# Altium PCB 16 chan.PcbDoc
Units mil, origin at the board's own origin, x right, y up, seen from the top; angles counter-clockwise.
Board outline 1152 x 1182 mil, 4 copper layers (Top Layer, Ground 2, Power 3, Bottom Layer); 36 components, 44 nets, 181 pads, 95 vias.
Unrouted connection lines stored in the file: 1.
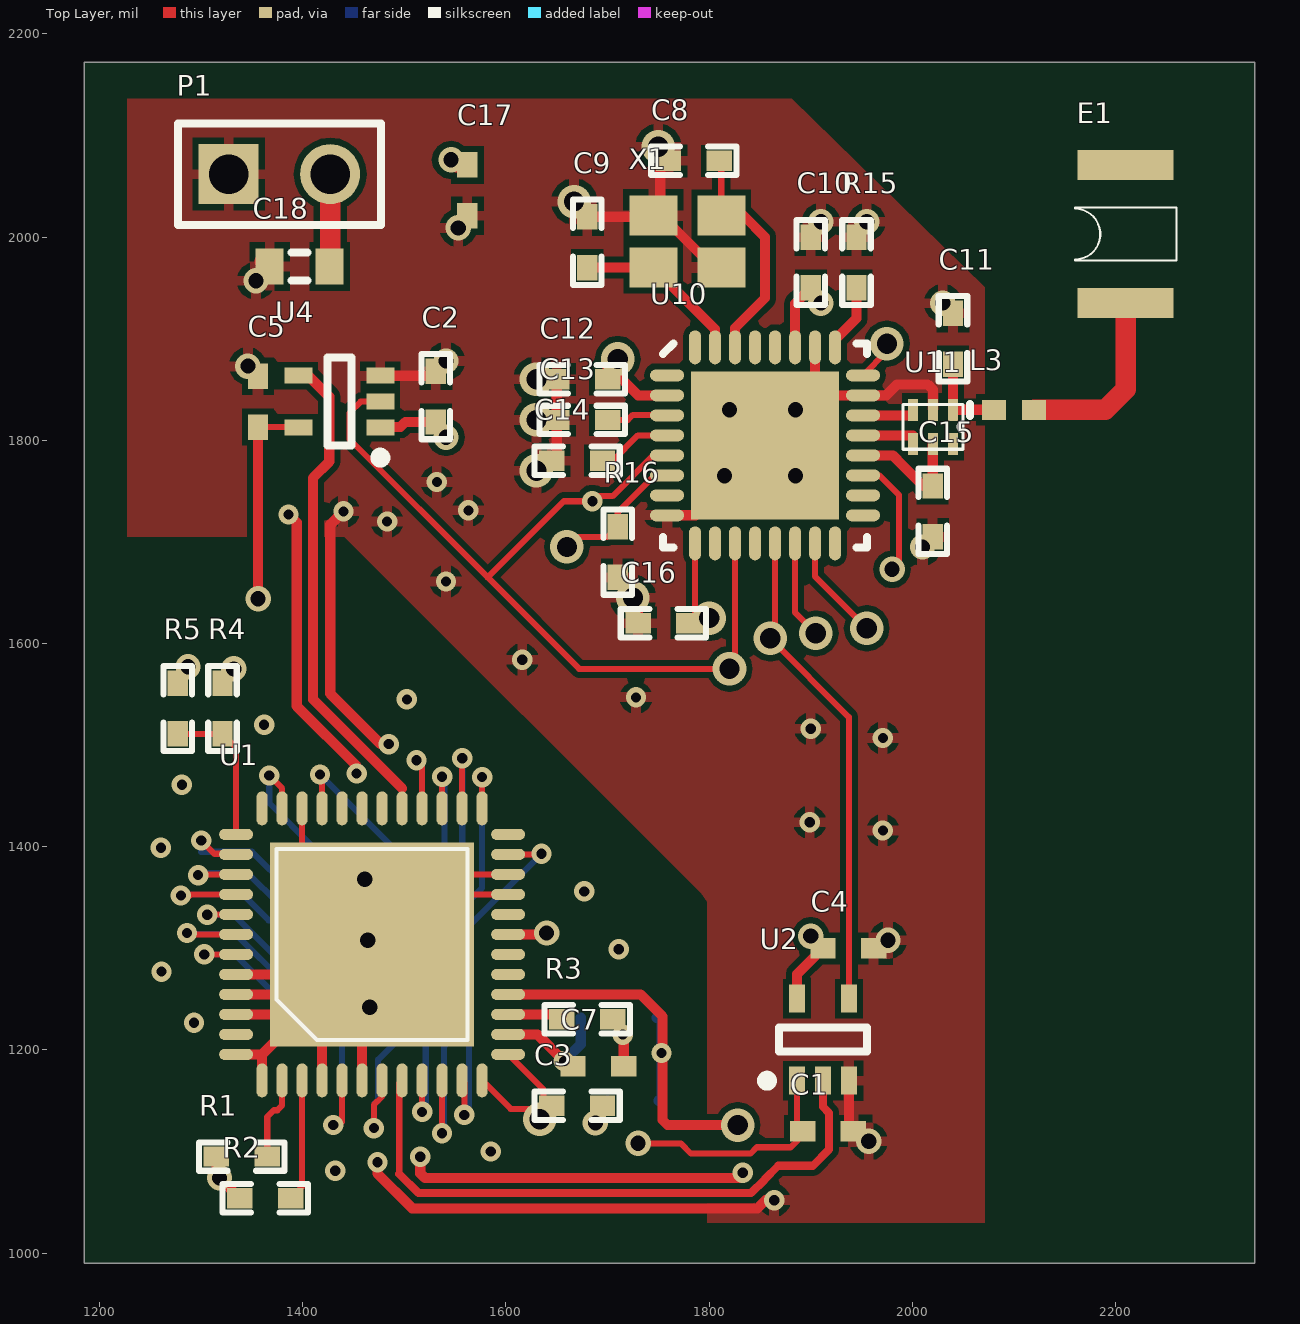
[diagram p0: Top Layer view]
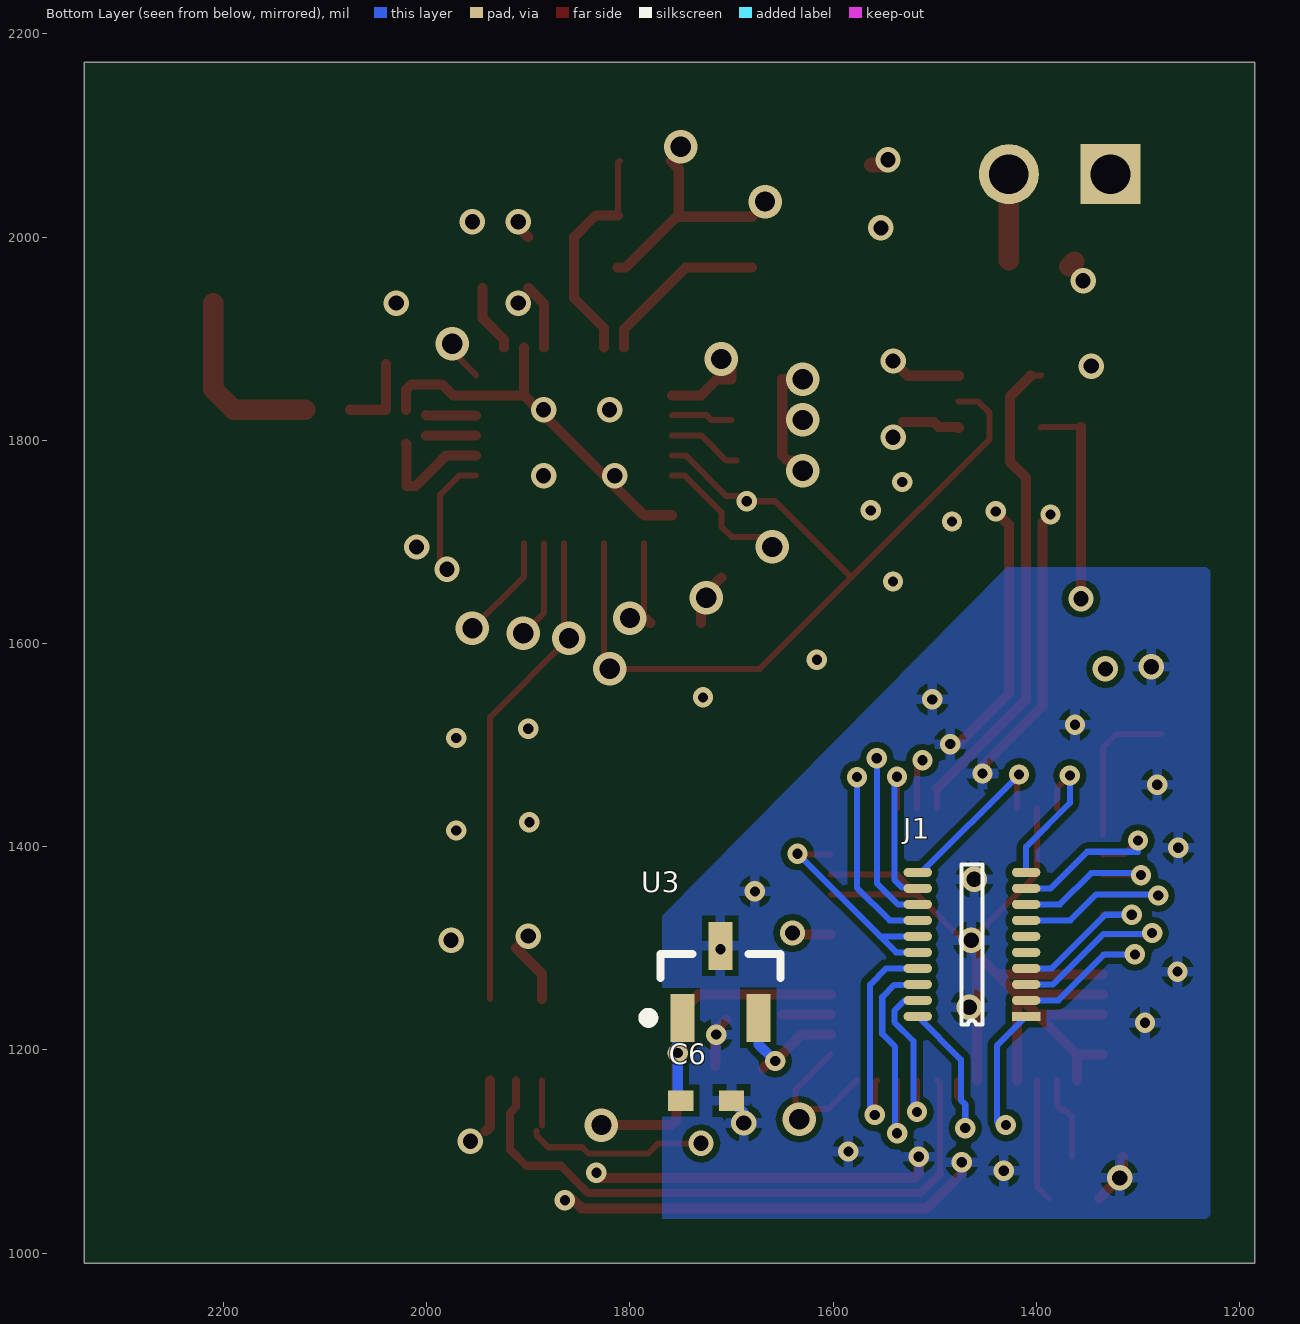
[diagram p1: Bottom Layer view, seen from below]
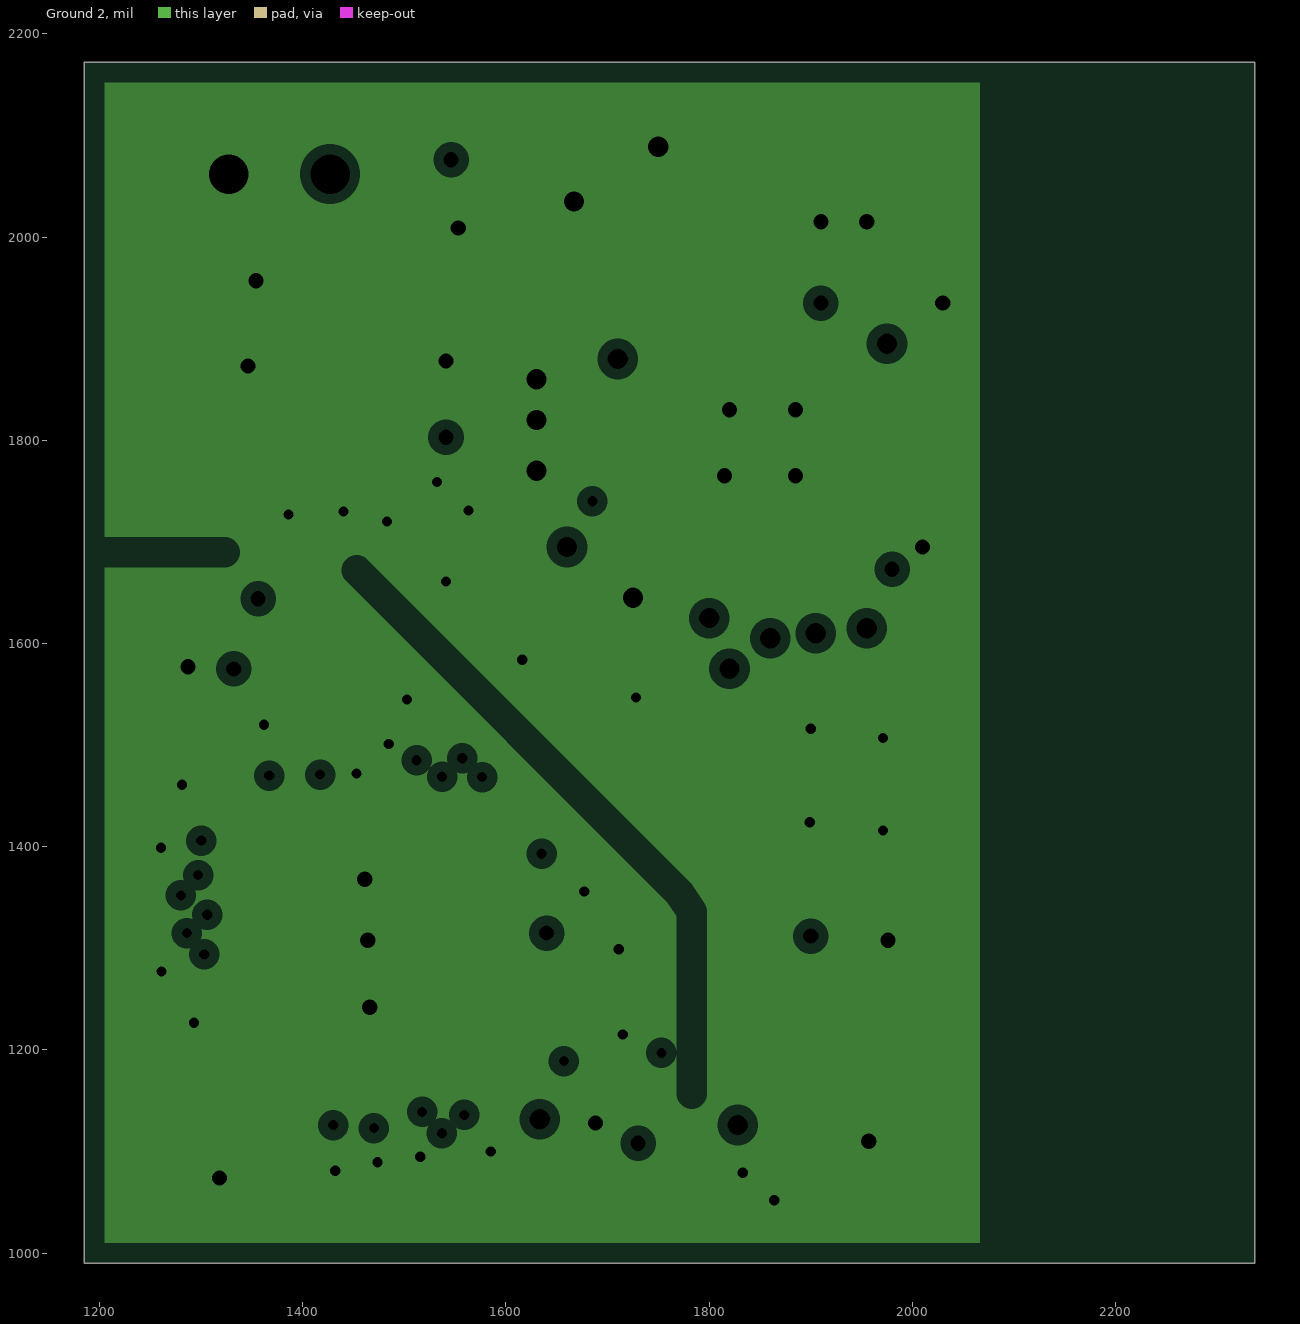
[diagram p2: Ground 2, clearances drawn from the general rule]
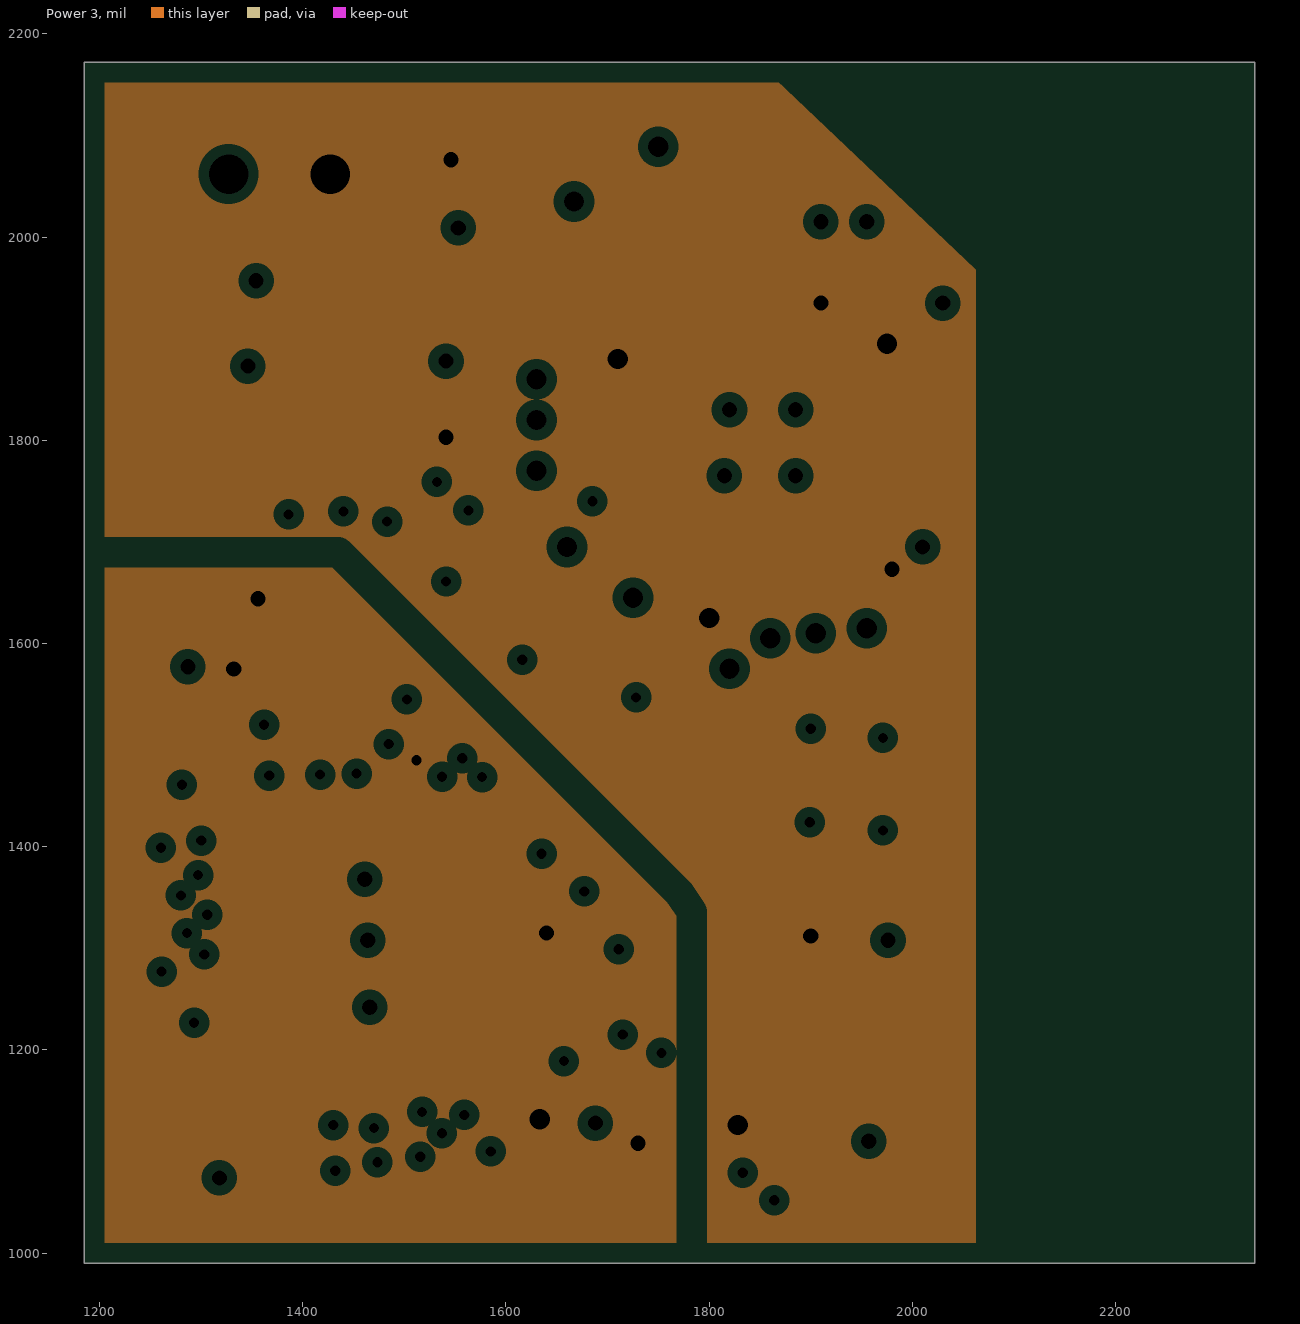
[diagram p3: Power 3, clearances drawn from the general rule]

## Layer stack, top to bottom
Top Layer: signal copper 1.4
Dielectric: core 12.6, FR-4, Dk 4.8
Ground 2: plane copper 1.4, net GND
Dielectric: prepreg 12.6, FR-4, Dk 4.8
Power 3: plane copper 1.4, net (Multiple Nets)
Dielectric: core 12.6, FR-4, Dk 4.8
Bottom Layer: signal copper 1.4

## Board outline
1185,990 1185,2172 2337,2172 2337,990

## Design rules (kind name [scope] priority, off if disabled: settings)
Clearance clr_ElecConnToPlane [IsNamedPolygon('Bottom Layer-GND') vs InNet('ELEC*') and IsPad] p1: gap=10
Clearance Clearance_plane [All vs InPolygon] p2: gap=6
Clearance Clearance_1 [All] p3: gap=6
ComponentClearance [All] p1: gap=6 collisioncheckmode=3 verticalgap=0 showdistances=TRUE
HoleSize [All] p1: absolutevalues=TRUE maxlimit=100 minlimit=10 maxpercent=80.000 minpercent=20.000
HoleToHoleClearance [All] p1: gap=6 allowstackedmicrovias=TRUE
MinimumAnnularRing [All] p1: minimumring=10
MinimumSolderMaskSliver [All] p1: minsoldermaskwidth=6
PlaneClearance [All] p1: clearance=10
PlaneConnect [All] p1: planeconnectstyle=Direct reliefexpansion=20 reliefentries=4 reliefconductorwidth=10 reliefairgap=10
PolygonConnect [All] p1: connectstyle=Relief reliefconductorwidth=10 reliefentries=4 polygonreliefangle="90 Angle"
RoomDefinition Main [InComponentClass('Main')] p1: confinementstyle=ConfineOut formatcopy=TRUE lockcomponents=FALSE outline 1705,535 4930,535 4930,620 1705,620
RoomDefinition 16ASIC [InComponentClass('16ASIC')] p2: confinementstyle=ConfineOut formatcopy=TRUE lockcomponents=FALSE outline 1375,50 3085,50 3085,475 1375,475
RoutingCorners [All] p1: cornerstyle=45-Degree minsetback=20 maxsetback=20
RoutingVias RoutingVias_Power [InNet('V1P5') Or InNet('GND') Or InNet('V3P0')] p1: holewidth=15 width=25 viastyle="Through Hole" minholewidth=10 minwidth=20 maxholewidth=28 maxwidth=50
RoutingVias [All] p2: holewidth=10 width=20 viastyle="Through Hole" minholewidth=10 minwidth=20 maxholewidth=100 maxwidth=500
SilkToSilkClearance [All] p1 off: silktosilkclearance=10
SilkscreenOverComponentPads [All] p1 off: minsilkscreentomaskgap=10
SolderMaskExpansion [All] p1: expansion=3
Width Width_v3p0 [InNet('V3P0')] p1: maxlimit=50 minlimit=6 preferedwidth=8
Width [All] p2: maxlimit=30 minlimit=6 preferedwidth=6
19 further rules are at their usual default settings.

## Classes and differential pairs
component class 16ASIC: C1 C2 C3 C4 C5 C6 C7 J1 R1 R2 R3 R4 R5 U1 U2 U3 U4
component class Main: C8 C9 C10 C11 C12 C13 C14 C15 C16 C17 C18 E1 L3 P1 R15 R16 U10 U11 X1

## Components (designator, comment, footprint, x,y, rotation, side; value= is the part's Value field where it differs from the comment)
C1 "NP0 50V" 0402s 1917,1120 r180 top
C2 "NP0 50V" 0402S 1531,1843 r270 top
C3 "NP0 50V" 0402S 1670,1145 r0 top
C4 "NP0 50V" 0402s 1937,1300 r0 top
C5 "NP0 50V" 0402s 1356,1838 r90 top
C6 "NP0 50V" 0402s 1725,1150 r0 bottom
C7 "NP0 50V" 0402s 1691,1184 r180 top
C8 "NP0 50V" 0402S 1785,2075 r0 top
C9 "NP0 50V" 0402S 1680,1995 r90 top
C10 "NP0 50V" 0402S 1900,1975 r90 top
C11 "NP0 50V" 0402S 2040,1900 r270 top
C12 "NP0 50V" 0402S 1675,1860 r180 top
C13 "NP0 50V" 0402S 1675,1820 r0 top
C14 "NP0 50V" 0402S 1670,1780 r180 top
C15 "NP0 50V" 0402S 2020,1730 r270 top
C16 "NP0 50V" 0402S 1755,1620 r0 top
C17 "NP0 50V" 0402s 1562,2046 r270 top
C18 "NP0 50V" J1-0603 1397,1971 r180 top
E1 "MicroAntenna" microantenna 2210,1935 r90 top
J1 "DF30FC-20DP" DF30FC-20DP 1410,1233 r0 bottom
L3 "Inductor" 0402-A 2100,1830 r0 top
P1 "Header 2" HDR1X2 1327,2062 r0 top
R1 "Res2" 0402S 1340,1095 r0 top
R2 "Res2" 0402S 1363,1054 r0 top
R3 "Res2" 0402S 1680,1230 r180 top
R4 "Res2" 0402S 1321,1536 r90 top
R5 "Res2" 0402S 1277,1536 r90 top
R15 "Res2" 0402S 1945,1975 r90 top
R16 "Res2" 0402S 1710,1690 r90 top
U1 "16ASIC" Quad48 1360,1170 r90 top
U2 "FXLP34" SOT353-5AN 1912,1210 r90 top
U3 "ISL60002BIH310Z-TK" SOT23-3L 1711,1267 r90 bottom
U4 "FXLP34" SOT353-5AN 1436,1838 r180 top
U10 "QFN32 5x5 package" NORDIC_QFN50P500X500X90-33N 1855,1795 r0 top
U11 "balun" balun 2040,1830 r270 top
X1 "TSX-3225, 16MHz, Cl=9pF, +/-10ppm" "bt-xtal 2.5 x 2 mm" 1745,1970 r0 top

## Footprints (in the part's own frame and the unit in brackets; to place one, negate y for a bottom-side part, rotate by r counter-clockwise, add the part's x,y. Pads: shape width x height; smd on the part's side, far side on the other; paste and mask are expansions set on the pad)
0402-A [mm] "Chip Inductor, Body 1.0x0.5mm, IPC High Density"
  rect 0.6x0.5 smd: 1(-0.5,0) 2(0.5,0)
  silkscreen extent -1.1,-0.15 -1.1,0.15, body extent -0.55,-0.3 0.55,0.3, height 0.55
0402s [mil]
  rect 25x20 smd: 1(-25,0) 2(25,0)
0402S [mil]
  rect 25x20 smd: 1(-25,0) 2(25,0)
  silkscreen extent -42,-14 42,14
balun [mm]
  rect 0.55x0.25 smd: 1(0,0) 2(0,-0.5) 3(0,-1) 4(0.85,-1) 5(0.85,-0.5) 6(0.85,0)
  silkscreen extent -0.14,-1.25 0.99,0.25
"bt-xtal 2.5 x 2 mm" [mm] "Mercury X32 series"
  rect 1.2x1 smd: 1(0,0) 2(1.7,0) 3(1.7,1.3) 4(0,1.3)
DF30FC-20DP [mm]
  rect 0.71x0.23 smd: 1(0,0)
  oval 0.71x0.23 smd: 2(0,-0.4) 3(0,-0.8) 4(0,-1.2) 5(0,-1.6) 6(0,-2) 7(0,-2.4) 8(0,-2.8) 9(0,-3.2) 10(0,-3.6) 11(2.71,-3.6) 12(2.71,-3.2) 13(2.71,-2.8) 14(2.71,-2.4) 15(2.71,-2) 16(2.71,-1.6) 17(2.71,-1.2) 18(2.71,-0.8) 19(2.71,-0.4) 20(2.71,0)
  silkscreen extent 1.09,-3.8 1.62,0.2
HDR1X2 [mm] "Connector; Header; 2 Position"
  rect 1.5x1.5 hole 0.991: 1(0,0)
  round 1.5 hole 0.991: 2(2.54,0)
  silkscreen extent -1.27,-1.27 3.81,1.27
J1-0603 [mm] "Chip Resistor, Body 1.6x0.8mm, IPC High Density"
  rect 0.7x0.9 smd: 1(-0.75,0) 2(0.75,0)
  silkscreen extent -0.2,-0.35 0.2,0.35, body extent -0.85,-0.48 0.85,0.48, height 0.9
microantenna [mm]
  rect 0.75x2.4 smd: 1(0,0) 2(3.45,0)
  silkscreen extent 1.06,-1.27 2.39,1.27
NORDIC_QFN50P500X500X90-33N [mm] "QFN32 5x5x0.85mm, 0.5mm pitch - Medium Density"
  oval 0.85x0.3 smd: 1(-2.45,1.75) 2(-2.45,1.25) 3(-2.45,0.75) 4(-2.45,0.25) 5(-2.45,-0.25) 6(-2.45,-0.75) 7(-2.45,-1.25) 8(-2.45,-1.75) 17(2.45,-1.75) 18(2.45,-1.25) 19(2.45,-0.75) 20(2.45,-0.25) 21(2.45,0.25) 22(2.45,0.75) 23(2.45,1.25) 24(2.45,1.75)
  oval 0.3x0.85 smd: 9(-1.75,-2.45) 10(-1.25,-2.45) 11(-0.75,-2.45) 12(-0.25,-2.45) 13(0.25,-2.45) 14(0.75,-2.45) 15(1.25,-2.45) 16(1.75,-2.45) 25(1.75,2.45) 26(1.25,2.45) 27(0.75,2.45) 28(0.25,2.45) 29(-0.25,2.45) 30(-0.75,2.45) 31(-1.25,2.45) 32(-1.75,2.45)
  rect 3.7x3.7 smd: 33(0,0)
  silkscreen extent -2.55,-2.55 2.55,2.55
Quad48 [mm]
  oval 0.85x0.28 smd: 1(0,0) 2(0,-0.5) 3(0,-1) 4(0,-1.5) 5(0,-2) 6(0,-2.5) 7(0,-3) 8(0,-3.5) 9(0,-4) 10(0,-4.5) 11(0,-5) 12(0,-5.5) 25(6.8,-5.5) 26(6.8,-5) 27(6.8,-4.5) 28(6.8,-4) 29(6.8,-3.5) 30(6.8,-3) 31(6.8,-2.5) 32(6.8,-2) 33(6.8,-1.5) 34(6.8,-1) 35(6.8,-0.5) 36(6.8,0)
  oval 0.28x0.85 smd: 13(0.65,-6.15) 14(1.15,-6.15) 15(1.65,-6.15) 16(2.15,-6.15) 17(2.65,-6.15) 18(3.15,-6.15) 19(3.65,-6.15) 20(4.15,-6.15) 21(4.65,-6.15) 22(5.15,-6.15) 23(5.65,-6.15) 24(6.15,-6.15) 37(6.15,0.65) 38(5.65,0.65) 39(5.15,0.65) 40(4.65,0.65) 41(4.15,0.65) 42(3.65,0.65) 43(3.15,0.65) 44(2.65,0.65) 45(2.15,0.65) 46(1.65,0.65) 47(1.15,0.65) 48(0.65,0.65)
  rect 5.1x5.1 smd: 49(3.4,-2.75)
  silkscreen extent 1.01,-5.14 5.79,-0.36
SOT23-3L [mm] "SOT23, 3-Leads, Body 2.9x1.3mm, Pitch 0.95mm, Lead Span 2.5mm, IPC High Density"
  rect 1.2x0.6 smd: 1(-0.9,0.95) 2(-0.9,-0.95) 3(0.9,0)
  silkscreen extent -1.02,-1.5 0.7,1.93, body extent -0.7,-1.5 0.7,1.5, height 1.1
SOT353-5AN [mm] "SOT353, 5-Leads, Body 2x1.3mm, Pitch 0.65mm, Lead Span 2.1mm, IPC Medium Density"
  rect 0.7x0.4 smd: 1(-1.025,0.65) 2(-1.025,0) 3(-1.025,-0.65) 4(1.025,-0.65) 5(1.025,0.65)
  silkscreen extent -1.15,-1.1 0.3,1.52, body extent -0.7,-1.1 0.7,1.1, height 1.1

## Part data
C1 C2 C3 C4 C5 C6 C7 C8 C9 C10 C11 C12 C13 C14 C15 C16 C17 C18: library part Cap, "Capacitor"
P1: "Header, 2-Pin"
R1 R2 R3 R4 R5 R15 R16: "Resistor"
U3: "IC VOLT REF FGA LV 1.024V SOT-23"
U10: library part "nRF24LE1 - 5x5", "2.4GHz Tranceiver with embedded MCU and 10 bit ADC"
X1: library part BT-XTAL, "Crystal"

## Via types
v1: diameter 20, hole 10, Top Layer to Bottom Layer, 50 vias
v2: diameter 25, hole 15, Top Layer to Bottom Layer, 29 vias
v3: diameter 33, hole 20, Top Layer to Bottom Layer, 16 vias

## Nets (pads, with @x,y where several pads share a name; then routed paths per layer and width w, separated by ;. In a path a pad name is that pad's centre, name@x,y a point inside that pad or via, vN(x,y) a via of type N, cw(c..) or ccw(c..) an arc to the next point about the centre after c; other vN are vias at no path point)
ADC_CLK_EXT: U1.29 U4.4 | length 487.2
  Top Layer w6: U4.4 U4.4@1405.41,1863.59 ; U1.29 1497.8,1457.2
  Top Layer w10: U4.4@1405.41,1863.59 1426,1843 1426,1779 1410,1763 1410,1545 1497.8,1457.2
ADC_CLK_MCU: U4.2 U10.5 U10.11 | length 890.7
  Top Layer w6: U4.2 1457,1838 1446,1827 1446,1801 1582,1665 ; U10.5 1745.16,1785.16 1705,1745 1690,1745 v1(1685,1740) 1657,1740 1582,1665 ; 1825.47,1614.41 1825.47,1580.47 v3(1820,1575) ; 1825.47,1635.59 U10.11 ; 1825.5,1614.44 1825.5,1635.56 ; v3@1830,1575 v3(1820,1575) ; 1582,1665 1672,1575 v3(1820,1575)
ELEC1: J1.14 U1.25 | length 212.8
  Top Layer w6: U1.25 v1(1576.54,1468.46)
  Bottom Layer w6: J1.14 1544.49,1327.49 1576.54,1359.54 v1(1576.54,1468.46)
ELEC2: J1.13 U1.26 | length 221.3
  Top Layer w6: U1.26 1556.85,1486.85 v1(1557,1487)
  Bottom Layer w6: J1.13 1536.24,1343.24 1557,1364 v1(1557,1487)
ELEC3: J1.12 U1.27 | length 160.1
  Top Layer w6: U1.27 v1(1537.17,1468.83)
  Bottom Layer w6: J1.12 1517.37,1359.66 1532,1359.66 1539.67,1367.33 1539.67,1466.33 v1(1537.17,1468.83)
ELEC4: J1.11 U1.33 | length 166.4
  Top Layer w6: U1.33 v1@1419.06,1467.94
  Bottom Layer w6: v1(1417,1471) J1.11@1513.27,1374.73
ELEC5: J1.10 U1.35 | length 150.6
  Top Layer w6: v1(1367,1470) 1379.69,1457.31 U1.35
  Bottom Layer w6: v1(1367,1470) 1367,1443 1410,1400 J1.10
ELEC6: J1.9 U1.38 | length 175.9
  Top Layer w6: v1(1300,1406) 1313,1393 1333.85,1393 U1.38
  Bottom Layer w6: v1(1300,1406) 1300,1395 1350,1395 1386.02,1358.98 J1.9
ELEC7: J1.8 U1.39 | length 165
  Top Layer w6: v1(1297,1372) 1303,1372 1304.24,1373.24 1304.24,1372.76 U1.39
  Bottom Layer w6: v1(1297,1372) 1299,1374 1346,1374 1376.76,1343.24 J1.8
ELEC8: U1.40 | length 188.9
  Top Layer w6: v1@1289,1352 1288,1353 1288.07,1353.07 1289.06,1353.07 1289.13,1353 1334.34,1353 U1.40
  Bottom Layer w6: v1(1280,1352) 1281,1353 1341,1353 1366.51,1327.49 1410,1327.49
ELEC9: J1.4 U1.41 | length 157.3
  Top Layer w6: v1@1304,1331 v1(1306,1333) 1306.39,1333.39 U1.41
  Bottom Layer w6: v1(1306,1333) 1332,1333 1384.76,1280.24 J1.4
ELEC10: J1.3 U1.42 | length 198.1
  Top Layer w6: v1@1283,1312 v1(1286,1315) 1287.3,1313.7 U1.42
  Bottom Layer w6: v1(1286,1315) 1287,1314 1334,1314 1383.5,1264.5 J1.3
ELEC11: J1.2 U1.43 | length 157.2
  Top Layer w6: v1(1303,1294) U1.43
  Bottom Layer w6: v1(1303,1294) 1333,1294 1378.25,1248.75 J1.2
ELEC12: J1.1 U1.5 | length 176.6
  Top Layer w6: v1(1430,1126) 1435.48,1126 1438.74,1129.26 U1.5
  Bottom Layer w6: J1.1 1438.74,1204.26 1438.74,1129.26 1435.48,1126 v1(1430,1126)
ELEC13: J1.20 U1.7 | length 179.7
  Top Layer w6: v1(1470,1123) 1470,1146 1478.11,1154.11 U1.7
  Bottom Layer w6: v1(1470,1123) 1470,1146.36 1474.18,1150.54 1474.18,1190.48 J1.20
ELEC14: J1.19 U1.9 | length 168
  Top Layer w6: v1(1517.48,1139) U1.9
  Bottom Layer w6: v1@1515,1139 1521,1145 1521,1208.73 1539.67,1227.4 1539.67,1238.6 1529.52,1248.75 J1.19
ELEC15: J1.18 U1.10 | length 242.5
  Top Layer w6: v1(1537,1118) 1537.17,1118.17 U1.10
  Bottom Layer w6: J1.18 1517.19,1264 1539.67,1264 1551.67,1252 1551.67,1215.67 1539,1203 1539,1121 1537,1119 v1(1537,1118) 1537,1112 v1@1540,1115
ELEC16: J1.17 U1.11 | length 216.8
  Top Layer w6: U1.11 1559,1167.85 v1(1559,1136)
  Bottom Layer w6: J1.17 1547.76,1280.24 1563.67,1264.33 v1@1563.67,1136
ELEC_REF: J1.15 J1.16 U1.23 | length 230.1
  Top Layer w6: U1.23 1630.44,1392.44 1631,1393 v1(1635,1393) v1@1636,1392
  Bottom Layer w6: J1.16 1537.99,1295.99 1553.74,1311.74 ; J1.15 1553.74,1311.74 ; v1(1635,1393) 1553.74,1311.74
FCSN: U10.15 | length 104.6
  Top Layer w6: U10.15 1904.21,1665.79 v3(1955,1615)
FMISO: U10.14 | length 97
  Top Layer w6: U10.14 1884.53,1630.47 v3(1905,1610)
FMOSI: U2.4 U10.13 | length 482.3
  Top Layer w6: U10.13 1864.84,1609.84 v3(1860,1605) 1937.59,1527.41 U2.4
GND: C1.1 C2.1 C3.2 C4.2 C5.2 C6.1 C7.1 C8.1 C9.2 C10.2 C11.1 C12.2 C13.1 C14.2 C15.2 C16.1 C17.2 C18.2 P1.1 R1.1 R2.1 R3.1 R5.2 R15.2 R16.1 U1.1 U1.4 U1.6 U1.21 U1.22 U1.34 U1.44 U1.45 U1.46 U1.48 U1.49 U2.3 U3.3 U4.3 U10.8 U10.23 U10.26 U10.33 U11.2 X1.2 X1.4 | length 3493.9
  Top Layer w6: U1.34 1399.37,1372.76 U1.49 U1.49@1517.48,1353.07 ; U1.21 U1.49@1517.48,1353.07 ; U1.22 1537.17,1372.76 U1.49@1517.48,1353.07
  Top Layer w10: v2@1287,1571 v2(1287,1577) ; R1.1 1315,1077 v2(1318,1074) R2.1 ; U1.48 1360,1195.59 ; U1.46 U1.49@1399.37,1234.96 ; U1.45 U1.49@1419.06,1254.65 ; U1.44 U1.49@1438.74,1274.33 ; U1.1 1360,1195.59 ; v1(1386,1727) 1394,1719 1394,1538.37 1453,1479.37 v1(1453,1472) ; U1.4 U1.49@1419.06,1254.65 ; v1(1440,1730) 1427,1717 1427,1550.63 1476.7,1500.93 v1(1484.66,1500.93) ; U1.6 U1.49@1458.43,1294.02 ; U1.49 U1.49@1458.43,1294.02 ; v1(1473.46,1089.46) 1473.46,1078.32 1507.79,1044 1847.5,1044 1855.5,1052 v1(1864,1052) ; U4.3 1526.59,1863.59 C2.1 ; v1(1515.69,1094.79) 1515.69,1078.53 1520.21,1074 1832.14,1074 1833,1074.86 v1(1833,1079) ; v3(1630,1820) C13.1 ; v3(1630,1860) C12.2 C13.1 ; C14.2@1640,1780 C14.2 1650,1785 C13.1 ; v3(1667,2035) 1667,2033 C9.2 1751.88,2020 1751.88,2066.88 C8.1 1750,2085 v3(1750,2089) ; v2(1688,1128) C3.2@1688,1138 ; R3.1 R3.1@1715,1220 ; R16.1 1730,1645 C16.1 ; v1(1715,1215) R3.1@1715,1220 ; C7.1 1716,1219 R3.1@1715,1220 ; X1.4@1753.07,2021.18 1804.25,1970 X1.2 ; U10.8 1758.72,1726.28 1786.28,1726.28 U10.33 U10.33@1904.21,1844.21 ; C10.2 1910,2010 v2(1910,2015) ; U10.26 U10.33@1904.21,1844.21 ; U2.3 1937.59,1124.41 C1.1 ; C1.1@1952,1110 v2(1957,1110) ; v2@1955,2010 v2(1955,2015) ; C4.2@1970,1308 v2(1976,1308) ; U11.2 2020.32,1849.68 2015,1855 1985,1855 1974.21,1844.21 U10.23 U10.33@1904.21,1844.21 ; 1360,1195.59 U1.49@1399.37,1234.96 ; U1.49@1399.37,1234.96 U1.49@1419.06,1254.65 ; U1.49@1419.06,1254.65 U1.49@1438.74,1274.33 ; U1.49@1438.74,1274.33 U1.49@1458.43,1294.02
  Top Layer w20: C18.2@1362.47,1976 C18.2
  Bottom Layer w10: v2(1688,1128) 1688,1138 C6.1
  other v1: 1432,1081 1585,1100 1293,1226.68 1261,1277 1711,1299 1677,1356 1260.32,1399 1971,1416 1899,1424 1281,1461 1971,1507 1900,1516 1362,1520 1502.49,1545 1728,1547 1616,1584 1541,1661 1483,1720 1563,1731 1532,1759
  other v2: 1466,1242 1464,1308 1461,1368 2010,1695 1815,1765 1885,1765 1820,1830 1885,1830 1346,1873 1541,1878 2030,1935 1354,1957 1553,2009
  other v3: 1725,1645 1630,1770
NetC8_2: C8.2 U10.30 X1.3 | length 227.2
  Top Layer w6: C8.2 1811.93,2073.07 X1.3
  Top Layer w10: X1.3 1833.82,2021.18 1855,2000 1855,1940 1825.47,1910.47 U10.30
NetC9_1: C9.1 U10.31 X1.1 | length 168.7
  Top Layer w10: C9.1 X1.1 1805.79,1909.21 U10.31
NetC11_2: C11.2 L3.1 U11.1 | length 80.3
  Top Layer w10: C11.2 U11.1 L3.1@2075.32,1830
NetC13_2: C13.2 U10.3 | length 60.8
  Top Layer w6: C13.2 1720,1820 1725,1825 1758.07,1825 U10.3
NetC14_1: C14.1 U10.4 | length 73.8
  Top Layer w6: C14.1 1705,1780 1729.84,1804.84 U10.4
NetC15_1: C15.1 U10.20 U11.5 | length 122.8
  Top Layer w10: U10.20 1980.84,1785.16 1984.71,1781.29 1984.71,1781.15 2010.86,1755 C15.1 2020,1796.22 U11.5
NetE1_1: E1.1 L3.2 | length 183.6
  Top Layer w20: L3.2 2190,1830 2210,1850 E1.1
NetJ1_5: J1.5 J1.6
NetR1_2: R1.2 U1.2 | length 83.1
  Top Layer w6: R1.2 1365,1134 1371.63,1140.63 1375,1140.63 1379.69,1145.31 U1.2
NetR2_2: R2.2 U1.3 | length 120.7
  Top Layer w6: R2.2 1399.37,1065.37 U1.3
NetR3_2: R3.2 U1.15 | length 47.8
  Top Layer w10: U1.15 R3.2@1649.96,1234.96
NetR15_1: R15.1 U10.25 | length 67.3
  Top Layer w10: U10.25 1923.9,1898.9 1945,1920 R15.1
NetU10_21: U10.21 U11.4 | length 49.2
  Top Layer w10: U10.21 U11.4@2000.63,1804.84
NetU10_22: U10.22 U11.3 | length 49.4
  Top Layer w10: U10.22 2000.16,1824.53 U11.3@2000.63,1825
PROG: R16.2 U10.6 | length 136
  Top Layer w6: v3(1660,1695) 1670,1705 1700,1705 R16.2 1710,1729.15 1746.32,1765.47 U10.6
PWM1: U10.7
SER_OUT_BUF: U1.8 U2.2 | length 612.1
  Top Layer w6: 1495,1078 1495,1167.2 U1.8
  Top Layer w8: 1495,1078 1514,1059 1841.28,1059 1854.28,1072 1854.28,1072.28 1868,1086 1902,1086 1918,1102 1918,1138 1912,1144 U2.2
V1P5: C1.2 C3.1 C5.1 R4.2 U1.12 U1.13 U1.19 U1.28 U2.1 U4.5 | length 658.1
  Top Layer w6: v2@1332,1572 v2(1332,1575) ; v2@1356,1642 1354,1642 v2(1356,1644) ; C5.1 1395.06,1813 U4.5 ; v1(1512,1485) 1517.48,1479.52 U1.28 ; U1.12 1604.54,1142 1637,1142 1637,1160.72 U1.13 ; v2@1628.7,1313.7 v2@1630,1315 ; v3(1633.3,1131.7) v3@1633.3,1133.3 ; v2(1730,1108) 1772,1108 1782,1098 1840.87,1098 1847.05,1104.18 1880.24,1104.18 1892,1115.94 C1.2 ; C1.2@1886.41,1125.59 U2.1
  Top Layer w10: v2(1356,1644) C5.1 ; U1.19 v2@1628.7,1313.7
  other v2: 1640,1315
V3P0: C2.2 C4.1 C6.2 C10.1 C12.1 C16.2 C17.1 C18.1 P1.2 U1.16 U2.5 U3.1 U4.1 U10.2 U10.9 U10.19 U10.24 U10.27 | length 1053.9
  Top Layer w6: C16.2@1786.1,1626.1 U10.9 ; U10.19 1967.47,1765.47 1987,1745.94 1987,1680 v2(1980,1673) ; U10.24 v3@1975,1887.44
  Top Layer w10: U4.1 1476.94,1813 1496,1813 1501,1818 C2.2 ; U1.16 1732.35,1254.65 1754,1233 1754,1131 1759,1126 v3(1828,1126) ; v3@1700,1870 C12.1 1714.21,1860 1730,1844.21 U10.2 ; C16.2 1785,1625 v3(1800,1625) ; U10.27 1884.53,1934.53 C10.1 ; U2.5 1886.41,1274.41 C4.1 v2(1900,1312) ; v2(1910,1935) v2@1910,1940
  Top Layer w15: v2(1546,2076) 1551,2071 C17.1
  Top Layer w20: C18.1@1427,1977 P1.2
  Bottom Layer w10: U3.1 cw(c1748.4,1226.97) 1753,1226.97 v1(1753,1197) 1753,1153 C6.2
  other v2: 1541,1803
  other v3: 1710,1880 1975,1895
VREF_1P0_VREG: C7.2 U1.14 U3.2 | length 116.2
  Top Layer w10: U1.14 1630.72,1215.28 v1(1657,1189) ; C7.2 1667,1184 C7.2@1669,1182
  Bottom Layer w10: v1@1659,1191 1673.6,1205.6 U3.2
VTUNE: R4.1 R5.1 U1.37 | length 148.4
  Top Layer w6: R5.1 R4.1 1334.41,1497.59 U1.37
pads on no net: E1.2 J1.7 U1.17 U1.18 U1.20 U1.24 U1.30 U1.31 U1.32 U1.36 U1.47 U10.1 U10.10 U10.12 U10.16 U10.17 U10.18 U10.28 U10.29 U10.32 U11.6

## Polygon pours and split planes (outlines as drawn)
GND on Bottom Layer "Bottom Layer-GND" (solid, pour order 3): 1229,1675 1429,1675 1768,1332 1768,1034 1229.02,1033.96
GND on Top Layer "Top Layer-gnd" (solid, pour order 4): 1227,1705 1441,1705 1792,1354 1798,1346 1798,1030 2071,1030 2071,2136 1227,2136
GND on Ground 2 (split plane): 2067,1010.1 1205.1,1010.1 1205.1,1675.11 1207,1674.93 1323,1674.93 1325.94,1675.22 1328.77,1676.07 1331.37,1677.47 1333.66,1679.34 1335.53,1681.63 1336.93,1684.23 1337.78,1687.06 1338.07,1690 1337.78,1692.94 1336.93,1695.77 1335.53,1698.37 1333.66,1700.66 1331.37,1702.53 1328.77,1703.93 1325.94,1704.78 1323,1705.07 1207,1705.07 1205.1,1704.89 1205.1,2151.9 2067,2151.9
V1P5 on Power 3 (split plane): 1207,1674.93 1428.76,1674.93 1758.35,1345.33 1767.93,1331.34 1767.93,1011 1768.02,1010.1 1205.1,1010.1 1205.1,1675.11
V3P0 on Power 3 (split plane): 2063,1967.63 2063,1010.1 1797.98,1010.1 1798.07,1011 1798.07,1336 1798.06,1336.08 1798.07,1336.17 1797.92,1337.55 1797.78,1338.94 1797.76,1339.02 1797.75,1339.1 1797.33,1340.43 1796.93,1341.77 1796.89,1341.84 1796.86,1341.92 1796.19,1343.14 1795.53,1344.37 1795.48,1344.44 1795.44,1344.51 1782.44,1363.51 1781.54,1364.58 1780.66,1365.66 1445.66,1700.66 1443.37,1702.53 1440.77,1703.93 1437.94,1704.78 1435,1705.07 1207,1705.07 1205.1,1704.89 1205.1,2151.9 1869.3,2151.9

## Other copper
Top Layer:
  pour cut-out: 1877.95,2147 2101,2147 2101,1929
Ground 2 (plane layer: these items are gaps in the copper):
  rectangle: 2067,1005 2318,2157
  lines w30: 1207,1690 1323,1690 ; 1453,1672 1770,1355 1783,1336 1783,1157
Power 3 (plane layer: these items are gaps in the copper):
  rectangle: 2063,994 2320,2160
  region: 1866.05,2155 2072,2155 2072,1959.06
  lines w30: 1207,1690 1435,1690 1770,1355 1783,1336 1783,1011

## Silkscreen, mask and mechanical layers (free items; w line width, h text height)
Mechanical 1:
  the board outline again, w10